# Altium PCB PCB2576可调电路.PcbDoc
Units mil, origin at the board's own origin, x right, y up, seen from the top; angles counter-clockwise.
Board outline 3937.01 x 2755.91 mil, 2 copper layers (Top Layer, Bottom Layer); 12 components, 10 nets, 40 pads, 4 vias.
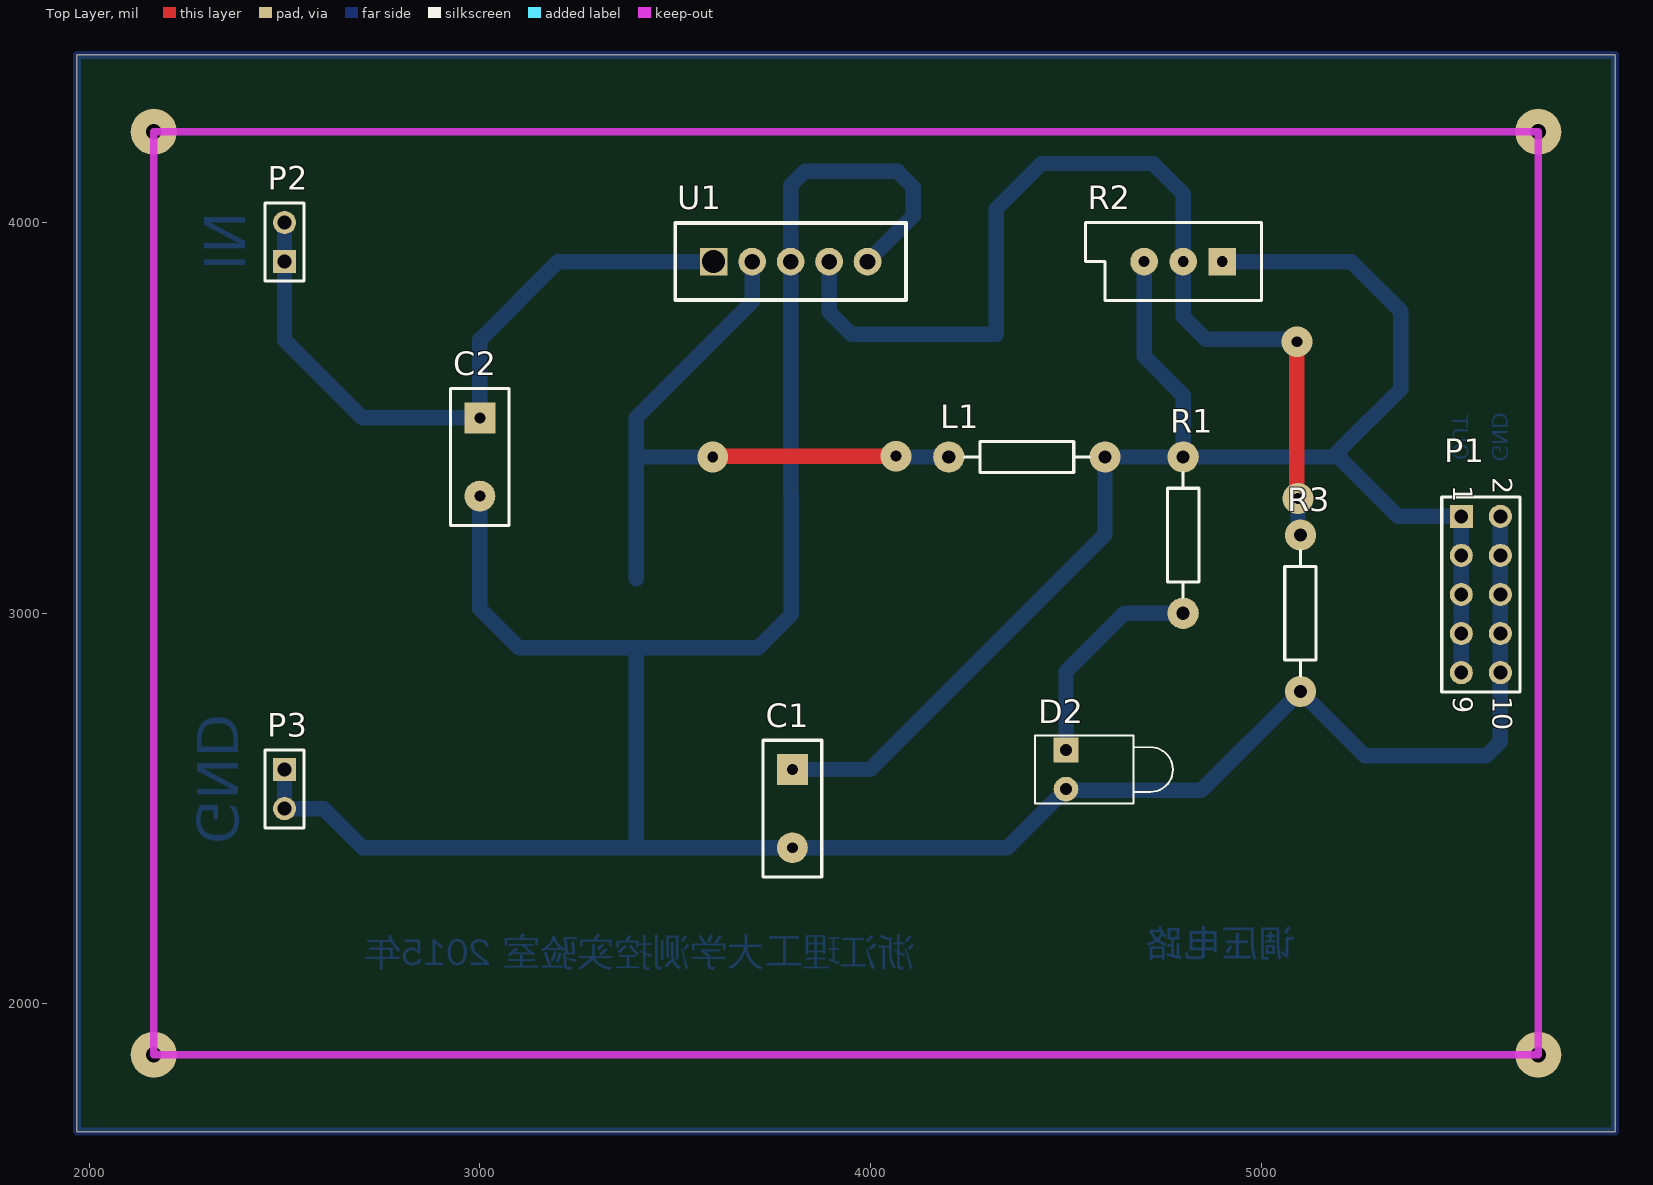
[diagram p0: Top Layer view]
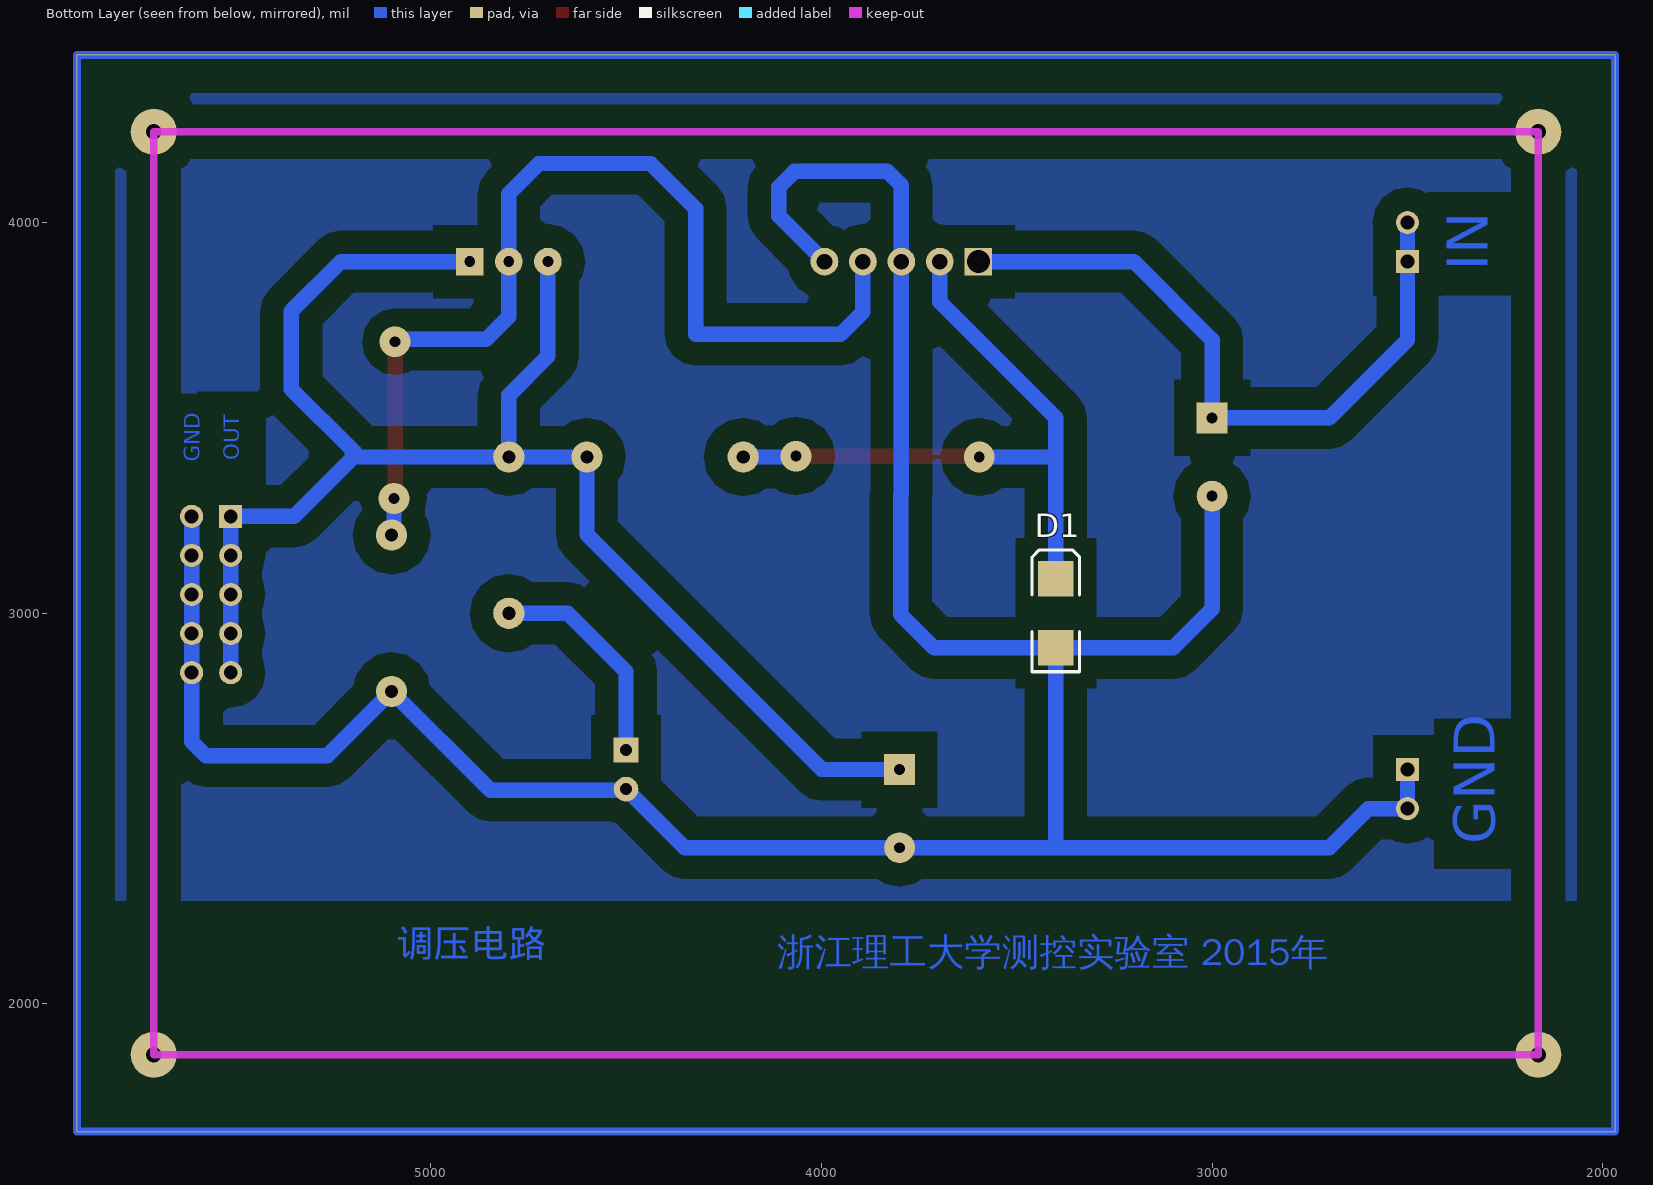
[diagram p1: Bottom Layer view, seen from below]

## Layer stack, top to bottom
Top Layer: signal copper 1.4
Dielectric: dielectric 12.6, FR-4, Dk 4.8
Bottom Layer: signal copper 1.4

## Board outline
1968.5,1673.23 1968.5,4429.13 5905.51,4429.13 5905.51,1673.23

## Design rules (kind name [scope] priority, off if disabled: settings)
Clearance [All] p1: gap=1
PolygonConnect [All] p1: connectstyle=Relief reliefconductorwidth=10 reliefentries=4 polygonreliefangle="90 Angle" airgapwidth=10
RoutingVias [All] p1: holewidth=28 width=50 viastyle="Through Hole" minholewidth=28 minwidth=50 maxholewidth=28 maxwidth=50
SolderMaskExpansion [All] p1: expansion=4
Width [All] p1: maxlimit=118.11 minlimit=31.5 preferedwidth=39.37
28 further rules are at their usual default settings.

## Components (designator, comment, footprint, x,y, rotation, side; value= is the part's Value field where it differs from the comment)
C1 "Cap Pol1" RAD-0.2 3800,2500 r270 top
C2 "Cap Pol1" RAD-0.2 3000,3400 r270 top
D1 "Diode 1N4007" SMB 3400,3000 r90 bottom
D2 "LED1" LED-1 4500,2600 r0 top
L1 "Res2" AXIAL-0.4 4400,3400 r0 top
P1 "Header 5X2" HDR2X5 5511.81,3248.03 r270 top
P2 "Header 2" HDR1X2 2500,3900 r90 top
P3 "Header 2" HDR1X2 2500,2600 r270 top
R1 "Res2" AXIAL-0.4 4800,3200 r90 top
R2 "RPot" VR5 4800,3900 r180 top
R3 "Res2" AXIAL-0.4 5100,3000 r90 top
U1 "LM2576" LM2576 3500,3900 r0 top

## Footprints (in the part's own frame and the unit in brackets; to place one, negate y for a bottom-side part, rotate by r counter-clockwise, add the part's x,y. Pads: shape width x height; smd on the part's side, far side on the other; paste and mask are expansions set on the pad)
AXIAL-0.4 [mil] "Axial Device, Thru-Hole; 2 Leads; 0.4 in Pin Spacing"
  round 80 hole 33.46: 1(-200,0) 2(200,0)
  silkscreen extent -160,-40 160,40
HDR1X2 [mm] "Connector; Header; 2 Position"
  rect 1.5x1.5 hole 0.9: 1(0,0)
  round 1.5 hole 0.9: 2(2.54,0)
  silkscreen extent -1.27,-1.27 3.81,1.27
HDR2X5 [mm] "Connector; Header; 5x2 Position"
  rect 1.5x1.5 hole 0.9: 1(0,0)
  round 1.5 hole 0.9: 2(0,2.54) 3(2.54,0) 4(2.54,2.54) 5(5.08,0) 6(5.08,2.54) 7(7.62,0) 8(7.62,2.54) 9(10.16,0) 10(10.16,2.54)
  silkscreen extent -1.27,-1.27 11.43,3.81
LED-1 [mm] "LED; 2 Leads"
  rect 1.6x1.6 hole 0.8: 1(0,1.27)
  round 1.6 hole 0.8: 2(0,-1.27)
  silkscreen extent -2,-2.2 6.95,2.2
LM2576 [mm]
  rect 1.8x1.8 hole 1.5: 1(2.5,0)
  round 1.8 hole 1.016: 2(5,0) 3(7.5,0) 4(10,0) 5(12.5,0)
  silkscreen extent 0,-2.5 15,2.5
RAD-0.2 [mm] "Radial Cap, Thru-Hole; 2 Leads; 0.2 in Pin Spacing"
  rect 2x2 hole 0.7: 1(-2.54,0)
  round 2 hole 0.7: 2(2.54,0)
  silkscreen extent -4.44,-1.91 4.44,1.91
SMB [mm] "DO-214-AA/SMB; 2 C-Bend Leads; Body 5.3 x 3.6 mm, inc. leads (LxW)"
  rect 2.3x2.3 smd: 1(-2.25,0) 2(2.25,0)
  silkscreen extent -3.8,-1.55 4.1,1.55
VR5 [mm] "Thru-Hole; 3 Leads"
  rect 1.8x1.8 hole 0.7: 1(-2.54,0)
  round 1.8 hole 0.7: 2(0,0) 3(2.54,0)
  silkscreen extent -5.08,-2.54 6.35,2.54

## Part data
C1 C2: "Polarized Capacitor (Radial)"
D1: "1 Amp General Purpose Rectifier"
D2: "Typical RED GaAs LED"
L1 R1 R3: "Resistor"
P1: "Header, 5-Pin, Dual row"
P2 P3: "Header, 2-Pin"
R2: "Potentiometer"

## Free pads (board coordinates)
  round 118.11 hole 40: 0(5708.66,4232.28) 1(5708.66,1870.08) 2(2165.35,1870.08) 3(2165.35,4232.28)

## Via types
v1: diameter 78.74, hole 28, Top Layer to Bottom Layer, 4 vias

## Nets (pads, with @x,y where several pads share a name; then routed paths per layer and width w, separated by ;. In a path a pad name is that pad's centre, name@x,y a point inside that pad or via, vN(x,y) a via of type N, cw(c..) or ccw(c..) an arc to the next point about the centre after c; other vN are vias at no path point)
GND: C1.2 C2.2 D1.1 D2.2 P1.2 P1.4 P1.6 P1.8 P1.10 P3.1 P3.2 R3.1 U1.3 U1.5 | length 7438.6
  Bottom Layer w39.37: P3.1 P3.2 2600,2500 2700,2400 3400,2400 ; C2.2 3000,3011.42 3100,2911.42 D1.1 ; U1.5 4109,4016.87 4109,4091 4069,4131 3831,4131 3795.27,4095.27 U1.3 3795.27,3304.73 3797,3303 3797,2997 3711.42,2911.42 D1.1 ; P1.2 P1.4 P1.6 P1.8 P1.10 5611.81,2671.81 5575,2635 5265,2635 R3.1 4847,2547 4503,2547 D2.2 4350,2400 C1.2 3400,2400 ; 3400,2400 D1.1
NetC1_1: C1.1 L1.2 P1.1 P1.3 P1.5 P1.7 P1.9 R1.2 R2.1 R2.3 | length 4120.3
  Bottom Layer w39.37: C1.1 3999,2600 4600,3201 L1.2 R1.2 ; R2.3 4700,3658 4800,3558 R1.2 ; R2.1 5230,3900 5357,3773 5357,3574 5200.5,3417.5 ; P1.9 P1.7 P1.5 P1.3 P1.1 5349.97,3248.03 5200.5,3397.5 5200.5,3417.5 ; R1.2 5183,3400 5200.5,3417.5
NetC2_1: C2.1 P2.1 P2.2 U1.1 | length 1864.1
  Bottom Layer w39.37: P2.1 P2.2 2500,3700 2700,3500 C2.1 3000,3700 3200,3900 U1.1
NetC3_1: 
NetC4_1: 
NetD1_2: D1.2 L1.1 U1.2 | length 1716.2
  Top Layer w39.37: v1@3597,3402 v1(4065,3402)
  Bottom Layer w39.37: D1.2 3400,3414 ; v1@3579,3400 3414,3400 3400,3414 ; U1.2 3696.85,3796.85 3400,3500 3400,3414 ; v1@4071,3400 L1.1
  other v1: 3596,3400
NetD2_1: D2.1 R1.1 | length 562.7
  Bottom Layer w39.37: D2.1 4500,2851 4649,3000 R1.1
NetD3_2: 
NetD4_1: 
NetR2_2: R2.2 R3.2 U1.4 | length 2580.3
  Top Layer w39.37: v1@5091,3304 v1(5091,3695)
  Bottom Layer w39.37: U1.4 3893.7,3771.3 3951,3714 4322,3714 4322,4036 4437,4151 4723,4151 4800,4074 R2.2 4800,3759 4858,3701 5085,3701 v1(5091,3695) ; v1(5094,3294) 5094,3206 R3.2
copper on no net: | length 13385.8
  Bottom Layer w20: 1968.5,1673.23 1968.5,4429.13 5905.51,4429.13 5905.51,1673.23 1968.5,1673.23

## Polygon pours and split planes (outlines as drawn)
no net on Bottom Layer "Top Layer-GND" (solid, pour order 6): 2066.93,4330.71 5807.09,4330.71 5807.09,2263.78 2066.93,2263.78

## Keep-outs
Keep-Out Layer:
  lines w20: 2165.35,1870.08 2165.35,4232.28 5708.66,4232.28 5708.66,1968.5 5708.66,1870.08 2165.35,1870.08

## Other copper
Bottom Layer:
  text "IN" at 2260,3877 h180 r270
  text "OUT" at 5490,3392 h40 r270
  text "GND" at 5591,3388 h40 r270
  text "GND" at 2242,2409 h180 r270
  text "调压电路" at 5088,2098 h120
  text "浙江理工大学测控实验室 2015年" at 4113,2076 h120

## Text inside footprints (layer, text, board x,y; h text height)
P1: Top Overlay "10" at 5591.81,2788.03 h50 r270; Top Overlay "9" at 5491.81,2788.03 h50 r270; Top Overlay "1" at 5491.81,3328.03 h50 r270; Top Overlay "2" at 5591.81,3348.03 h50 r270